# EAGLE board Bottom_Board (EAGLE 6.5.0)
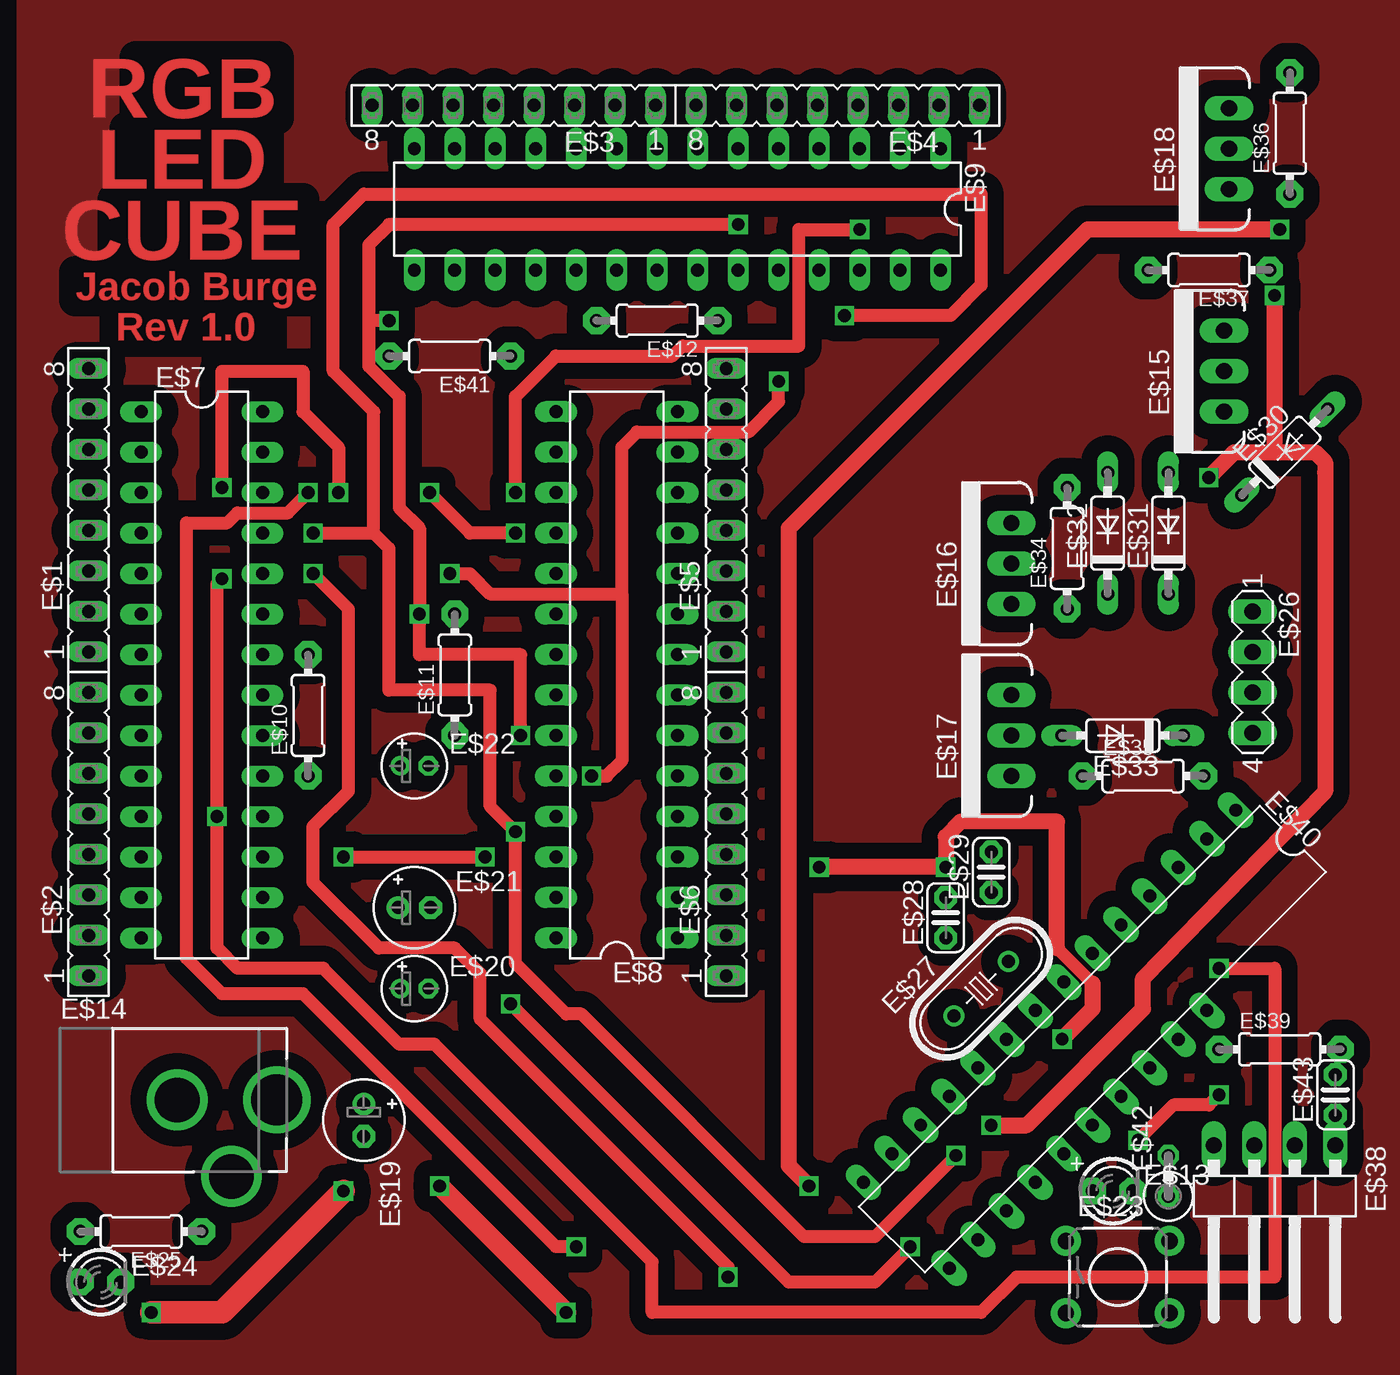
[diagram p0: board, top side]
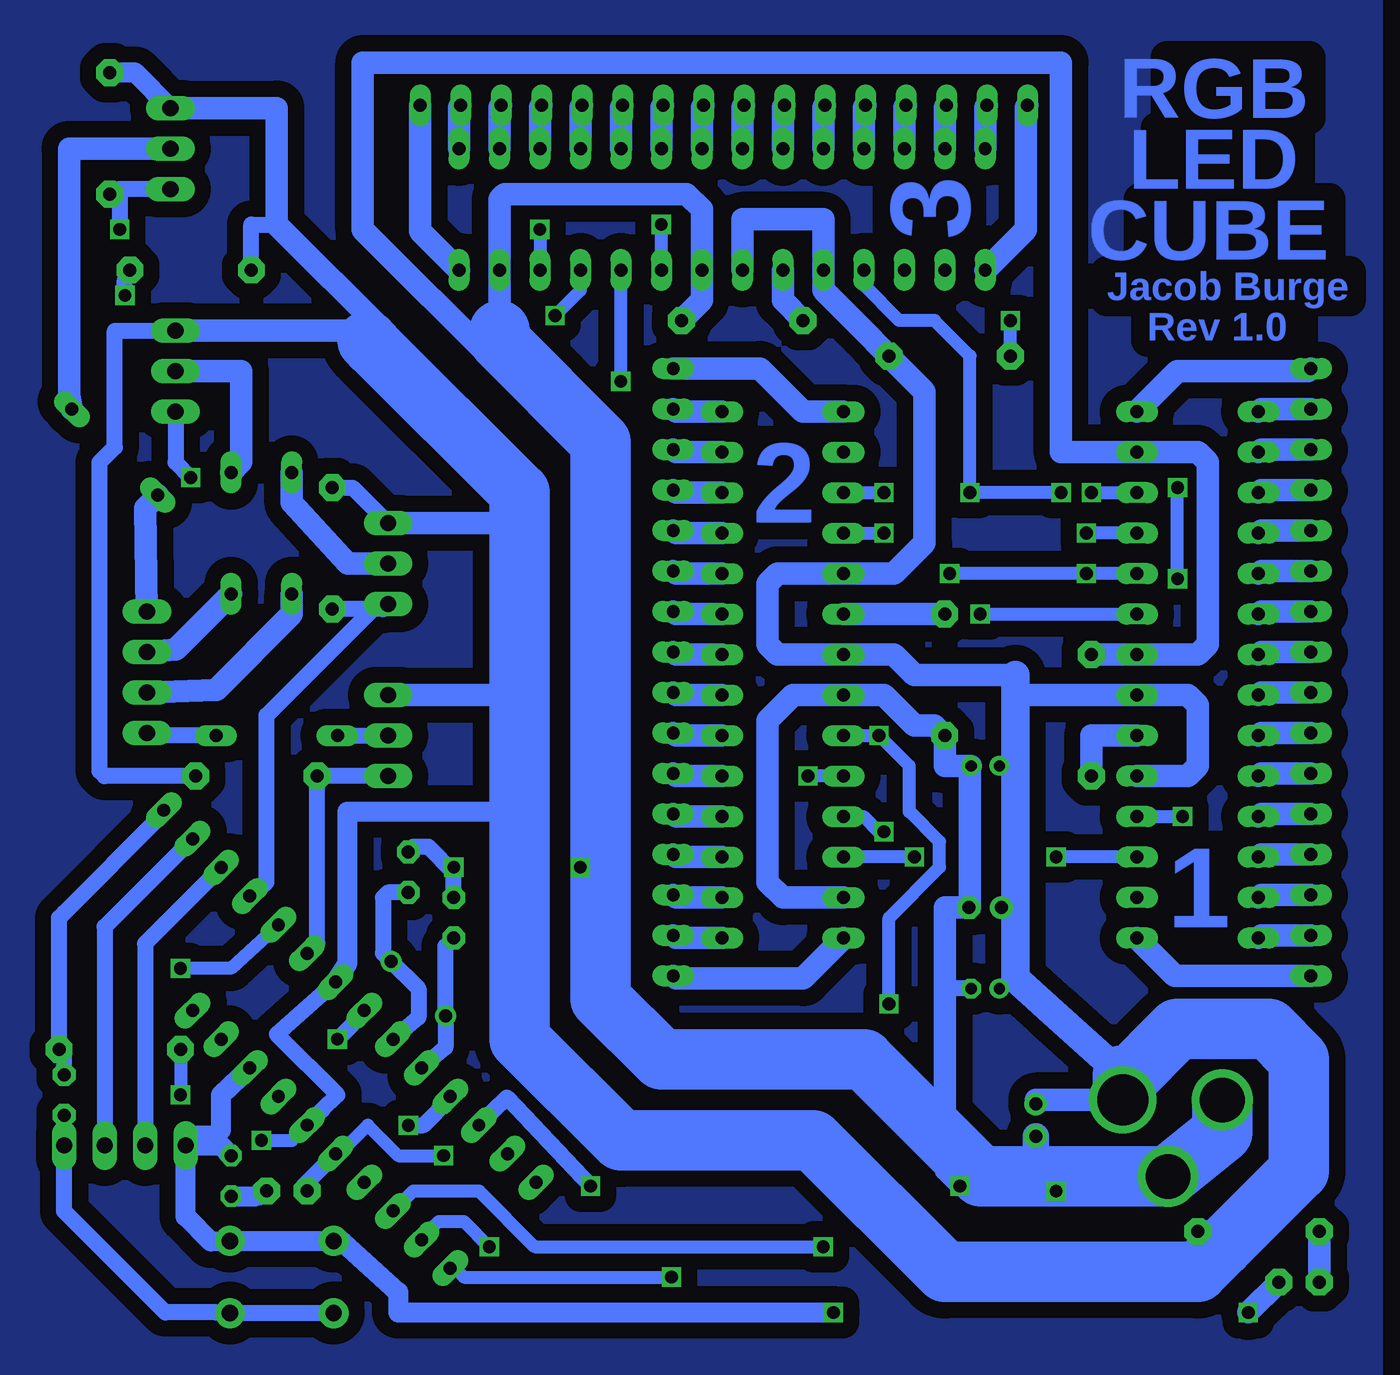
[diagram p1: board, bottom side, seen from below]

No outline drawn. Coordinates in mm, seen from the top.
Copper layers (1*16): Top 0.035mm / dielectric 1.5mm / Bottom 0.035mm
Design rules "default": minimum track width 10mil, minimum drill 24mil, track to track 8mil, track to pad 8mil, pad to pad 8mil, via to via 8mil, smd to smd 8mil, copper to edge 40mil, drill to drill 8mil, minimum pad ring 10mil, minimum via ring 8mil, stop-mask expansion 4mil, vias tented up to drill 0mil, thermal gap 10mil

## Footprints (pad centres in the part's own frame; a part is rotated, then mirrored left to right if it is on the bottom)
FE08 = drill 0.813 long: 1 -8.89,0; 2 -6.35,0; 3 -3.81,0; 4 -1.27,0; 5 1.27,0; 6 3.81,0; 7 6.35,0; 8 8.89,0
DIL28-3 = drill 0.813 long: 1 -16.51,-3.81; 2 -13.97,-3.81; 3 -11.43,-3.81; 4 -8.89,-3.81; 5 -6.35,-3.81; 6 -3.81,-3.81; 7 -1.27,-3.81; 8 1.27,-3.81; 9 3.81,-3.81; 10 6.35,-3.81; 11 8.89,-3.81; 12 11.43,-3.81; 13 13.97,-3.81; 14 16.51,-3.81; 15 16.51,3.81; 16 13.97,3.81; 17 11.43,3.81; 18 8.89,3.81; 19 6.35,3.81; 20 3.81,3.81; 21 1.27,3.81; 22 -1.27,3.81; 23 -3.81,3.81; 24 -6.35,3.81; 25 -8.89,3.81; 26 -11.43,3.81; 27 -13.97,3.81; 28 -16.51,3.81
0204/7 = drill 0.813 pad 1.676 octagon: 1 -3.81,0; 2 3.81,0
LED3MM = drill 0.813 pad 1.676 octagon: A -1.27,0; K 1.27,0
DCJACK_2MM_PTH = drill 2.8: GND 0,7.35; GNDBREAK 4.8,10.75 | drill 3.2: PWR 0,13.6
TO220V = drill 1.016 long: 1 -2.54,0; 2 0,0; 3 2.54,0
E2-5 = drill 0.813 pad 1.422: + -1.016,0 | drill 0.813 pad 1.422 octagon: - 1.016,0
E1,8-4 = drill 0.711 pad 1.168: + -0.889,0 | drill 0.711 pad 1.168 octagon: - 0.889,0
TACTILE-PTH = drill 1.016 pad 1.88: 1 -3.251,2.261; 2 3.251,2.261; 3 -3.251,-2.261; 4 3.251,-2.261
MA04-1 = drill 1.016 long: 1 -3.81,0; 2 -1.27,0; 3 1.27,0; 4 3.81,0
HC49/S = drill 0.813: 1 -2.413,0; 2 2.413,0
C025-024X044 = drill 0.813 pad 1.422 octagon: 1 -1.27,0; 2 1.27,0
DIODE_DO35-7 = drill 0.813 long: A 3.81,0; C -3.81,0
1X04/90 = drill 1.016 long: 1 -3.81,-3.81; 2 -1.27,-3.81; 3 1.27,-3.81; 4 3.81,-3.81
DIP_28_MOD = drill 0.813 long: 1 -16.51,-3.81; 2 -13.97,-3.81; 3 -11.43,-3.81; 4 -8.89,-3.81; 5 -6.35,-3.81; 6 -3.81,-3.81; 7 -1.27,-3.81; 8 1.27,-3.81; 9 3.81,-3.81; 10 6.35,-3.81; 11 8.89,-3.81; 12 11.43,-3.81; 13 13.97,-3.81; 14 16.51,-3.81; 15 16.51,3.81; 16 13.97,3.81; 17 11.43,3.81; 18 8.89,3.81; 19 6.35,3.81; 20 3.81,3.81; 21 1.27,3.81; 22 -1.27,3.81; 23 -3.81,3.81; 24 -6.35,3.81
0309V = drill 0.813 octagon: 1 -1.27,0; 2 1.27,0

## Placement (x,y rotation side)
E$1  [FE08]  4.33,52.87 90 top
E$2  [FE08]  4.33,32.55 90 top
E$3  [FE08]  31,78.27 180 top
E$4  [FE08]  51.32,78.27 180 top
E$5  [FE08]  44.34,52.87 90 top
E$6  [FE08]  44.34,32.55 90 top
E$7  [DIL28-3]  11.43,42.55 270 top
E$8  [DIL28-3]  37.47,42.55 90 top
E$9  [DIL28-3]  41.27,71.75 180 top
E$10  [0204/7]  18.1,40.01 90 top
E$11  [0204/7]  27.3,42.55 90 top
E$12  [0204/7]  40.01,64.77 180 top
E$13  [LED3MM]  68.58,10.16 0 top
E$14  [DCJACK_2MM_PTH]  2.54,15.88 270 top
E$15  [TO220V]  75.56,61.59 90 top
E$16  [TO220V]  62.23,49.53 90 top
E$17  [TO220V]  62.23,38.73 90 top
E$18  [TO220V]  75.88,75.56 90 top
E$19  [E2-5]  21.59,14.61 270 top
E$20  [E1,8-4]  24.77,22.86 0 top
E$21  [E2-5]  24.77,27.94 0 top
E$22  [E1,8-4]  24.77,36.83 0 top
E$23  [TACTILE-PTH]  68.9,4.76 0 top
E$24  [LED3MM]  5.08,4.45 0 top
E$25  [0204/7]  7.62,7.62 180 top
E$26  [MA04-1]  77.36,42.71 270 top
E$27  [HC49/S]  60.33,22.86 45 top
E$28  [C025-024X044]  58.1,27.3 90 top
E$29  [C025-024X044]  60.96,30.16 90 top
E$30  [DIODE_DO35-7]  79.38,56.52 45 top
E$31  [DIODE_DO35-7]  72.07,51.44 90 top
E$32  [DIODE_DO35-7]  68.26,51.44 90 top
E$33  [DIODE_DO35-7]  69.22,38.73 180 top
E$34  [0204/7]  65.72,50.48 90 top
E$35  [0204/7]  70.48,36.2 0 top
E$36  [0204/7]  79.69,76.52 90 top
E$37  [0204/7]  74.61,67.94 180 top
E$38  [1X04/90]  78.74,9.21 180 top
E$39  [0204/7]  79.06,19.05 0 top
E$40  [DIP_28_MOD]  67.31,19.68 225 top
E$41  [0204/7]  26.99,62.55 180 top
E$42  [0309V]  72.07,11.11 90 top
E$43  [C025-024X044]  82.55,16.19 90 top

## Library data of the parts
E$1-E$6 = con-lsta
E$7-E$9 = 40xx
E$10-E$14 E$19-E$22 E$24 E$25 E$27-E$29 E$34-E$37 E$39 E$41-E$43 = adafruit
E$15-E$18 = SparkFun-DiscreteSemi
E$23 = SparkFun-Electromechanical
E$26 = con-lstb
E$30-E$33 = eagle-ltspice
E$38 = pinhead
E$40 = DIP_28_MOD

## Nets
S$1: E$1.7 E$7.1
S$2: E$1.6 E$7.2
S$3: E$1.5 E$7.3
S$4: E$1.4 E$7.4
S$5: E$1.3 E$7.5
S$6: E$1.2 E$7.6
S$7: E$1.1 E$7.7
S$8: E$2.8 E$7.8
S$9: E$2.7 E$7.9
S$10: E$2.6 E$7.10
S$11: E$2.5 E$7.11
S$12: E$2.4 E$7.12
S$13: E$2.3 E$7.13
S$14: E$2.2 E$7.14
S$15: E$2.1 E$7.15
S$16: E$1.8 E$7.28
S$17: E$3.7 E$9.14
S$18: E$3.6 E$9.13
S$19: E$3.5 E$9.12
S$20: E$3.4 E$9.11
S$21: E$3.3 E$9.10
S$22: E$3.2 E$9.9
S$23: E$3.1 E$9.8
S$24: E$4.8 E$9.7
S$25: E$4.7 E$9.6
S$26: E$4.6 E$9.5
S$27: E$4.5 E$9.4
S$28: E$4.4 E$9.3
S$29: E$4.3 E$9.2
S$30: E$4.2 E$9.1
S$31: E$4.1 E$9.28
S$32: E$3.8 E$9.15
S$33: E$5.7 E$8.14
S$34: E$5.6 E$8.13
S$35: E$5.5 E$8.12
S$36: E$5.4 E$8.11
S$37: E$5.3 E$8.10
S$38: E$5.2 E$8.9
S$39: E$5.1 E$8.8
S$40: E$6.8 E$8.7
S$41: E$6.7 E$8.6
S$42: E$6.6 E$8.5
S$43: E$6.5 E$8.4
S$44: E$6.4 E$8.3
S$45: E$6.2 E$8.1
S$46: E$6.3 E$8.2
S$47: E$6.1 E$8.28
S$48: E$5.8 E$8.15
S$49: E$7.22 E$7.27 E$9.22 E$9.27 E$10.2 E$12.1
S$50: E$9.20 E$12.2
S$51: E$8.20 E$11.2
S$52: E$7.20 E$10.1
S$54: E$20.-
S$56: E$14.GND E$14.GNDBREAK E$24.K
S$57: E$7.26 E$40.17
S$58: E$19.-
S$59: E$24.A E$25.2
S$60: E$27.1 E$28.1
S$61: E$27.2 E$29.1
S$62: E$18.1 E$36.1
S$64: E$17.1 E$35.1
S$65: E$16.1 E$34.1 E$40.4
S$66: E$26.1 E$30.C
S$67: E$18.2 E$30.A
S$68: E$15.2 E$31.A
S$69: E$26.2 E$31.C
S$70: E$26.3 E$32.C
S$71: E$16.2 E$32.A
S$72: E$17.2 E$33.A
S$73: E$26.4 E$33.C
S$75: E$7.19 E$7.21 E$8.19 E$8.21 E$9.19 E$9.21 E$14.PWR E$17.3 E$18.3 E$19.+ E$20.+ E$21.+ E$22.+ E$25.1 E$36.2 E$37.2 E$39.1
S$77: E$23.3 E$23.4 E$38.1 E$43.1
S$79: E$38.2
S$80: E$38.3
S$81: E$23.1 E$23.2 E$38.4 E$40.22 E$42.2
S$82: E$7.25 E$8.25 E$9.25 E$13.A E$40.19
S$83: E$13.K E$42.1
S$84: E$28.2 E$29.2
S$85: E$7.18 E$8.18 E$9.18 E$40.5
S$86: E$15.3 E$35.2
S$87: E$16.3
S$88: E$34.2
S$89: E$15.1 E$37.1
S$90: E$7.17 E$8.26
S$91: E$8.17 E$9.26
S$92: E$7.24 E$8.24 E$9.24 E$40.15
S$93: E$7.23 E$8.23 E$9.23 E$40.16 E$41.2
S$94: E$8.22 E$8.27 E$11.1 E$22.-
S$95: E$39.2 E$43.2

## Tracks (layer width: path | path; a pad name or v marks a point on that pad's centre or on a via)
S$1
  Bottom 1.422: E$7.1 7.46,59.22 E$1.7
S$2
  Bottom 1.422: E$7.2 7.46,56.68 E$1.6
S$3
  Bottom 1.422: E$7.3 7.46,54.14 E$1.5
S$4
  Bottom 1.422: E$7.4 7.46,51.6 E$1.4
S$5
  Bottom 1.422: E$7.5 7.46,49.06 E$1.3
S$6
  Bottom 1.422: E$7.6 7.46,46.52 E$1.2
S$7
  Bottom 1.422: E$7.7 7.46,43.98 E$1.1
S$8
  Bottom 1.422: E$7.8 7.46,41.44 E$2.8
S$9
  Bottom 1.422: E$7.9 7.46,38.9 E$2.7
S$10
  Bottom 1.422: E$7.10 7.46,36.36 E$2.6
S$11
  Bottom 1.422: E$7.11 7.46,33.82 E$2.5
S$12
  Bottom 1.422: E$7.12 7.46,31.28 E$2.4
S$13
  Bottom 1.422: E$7.13 7.46,28.74 E$2.3
S$14
  Bottom 1.422: E$7.14 7.46,26.2 E$2.2
S$15
  Bottom 1.422: E$7.15 12.87,23.66 E$2.1
S$16
  Bottom 1.422: E$1.8 4.5,61.59 12.7,61.59 E$7.28
S$17
  Bottom 1.422: E$9.14 24.77,78.16 E$3.7
S$18
  Bottom 1.422: E$9.13 27.3,78.16 E$3.6
S$19
  Bottom 1.422: E$9.12 29.84,78.16 E$3.5
S$20
  Bottom 1.422: E$9.11 32.38,78.16 E$3.4
S$21
  Bottom 1.422: E$9.10 34.92,78.16 E$3.3
S$22
  Bottom 1.422: E$9.9 37.47,78.16 E$3.2
S$23
  Bottom 1.422: E$9.8 40.01,78.16 E$3.1
S$24
  Bottom 1.422: E$9.7 42.55,78.16 E$4.8
S$25
  Bottom 1.422: E$9.6 45.09,78.16 E$4.7
S$26
  Bottom 1.422: E$9.5 47.62,78.16 E$4.6
S$27
  Bottom 1.422: E$9.4 50.16,78.16 E$4.5
S$28
  Bottom 1.422: E$9.3 52.7,78.16 E$4.4
S$29
  Bottom 1.422: E$9.2 55.24,78.16 E$4.3
S$30
  Bottom 1.422: E$9.1 57.78,78.16 E$4.2
S$31
  Bottom 1.422: E$4.1 60.21,70.37 E$9.28
S$32
  Bottom 1.422: E$3.8 22.23,78.16 22.23,70.48 E$9.15
S$33
  Bottom 1.422: E$8.14 44.17,59.05 E$5.7
S$34
  Bottom 1.422: E$8.13 44.17,56.52 E$5.6
S$35
  Bottom 1.422: E$8.12 44.17,53.98 E$5.5
S$36
  Bottom 1.422: E$8.11 44.17,51.44 E$5.4
S$37
  Bottom 1.422: E$8.10 44.17,48.9 E$5.3
S$38
  Bottom 1.422: E$8.9 44.17,46.35 E$5.2
S$39
  Bottom 1.422: E$8.8 44.17,43.81 E$5.1
S$40
  Bottom 1.422: E$8.7 44.17,41.27 E$6.8
S$41
  Bottom 1.422: E$8.6 44.17,38.73 E$6.7
S$42
  Bottom 1.422: E$8.5 44.17,36.2 E$6.6
S$43
  Bottom 1.422: E$8.4 44.17,33.66 E$6.5
S$44
  Bottom 1.422: E$8.3 44.17,31.11 E$6.4
S$45
  Bottom 1.422: E$8.1 44.17,26.04 E$6.2
S$46
  Bottom 1.422: E$8.2 44.17,28.57 E$6.3
S$47
  Bottom 1.422: E$8.28 36.2,23.5 44.17,23.5 E$6.1
S$48
  Bottom 1.422: E$5.8 38.9,61.76 36.2,59.05 E$8.15
S$49
  Bottom 1.422: E$9.27 55.24,64.14 | E$9.27 55.24,72.39 54.93,72.71 43.5,72.71 42.55,71.75 E$9.22 42.55,66.04 E$12.1 | E$10.2 E$7.22 11.43,43.81 10.79,44.45 10.79,55.88 11.43,56.52 E$7.27 20,56.52 20,80.96 63.82,80.96 63.82,70.48 55.24,61.91 E$9.27
S$50
  Bottom 1.422: E$12.2 37.47,66.04 E$9.20
S$51
  Bottom 1.422: E$8.20 E$11.2
S$52
  Bottom 1.422: E$7.20 18.1,38.73 E$10.1
S$53
  Bottom 1.016: 76.29,34.05 76.52,33.66 82.55,27.62
S$54
  Bottom 1.016: E$20.- 27.3,22.86
S$55
  Bottom 1.422: 25.72,27.94 27.3,27.94 27.3,13.65
S$56  (via drill 0.8)
  Top 1.422: v8.26,2.54 12.7,2.54 v20.32,10.16
  Bottom 1.422: E$24.K v8.26,2.54 | v20.32,10.16 14.21,10.16 E$14.GNDBREAK
  Bottom 3.81: E$14.GND 9.89,13.84 E$14.GNDBREAK 25.05,11.07 32.38,18.41 45.09,18.41 48.9,22.23 48.9,57.15 55.24,63.5 55.24,64.14
S$57  (via drill 0.8)
  Top 0.813: v34.92,6.67 33.66,6.67 17.78,22.54 12.7,22.54 10.48,24.77 10.48,52.07 13.02,52.07 13.65,52.7 16.83,52.7 v18.1,53.98
  Bottom 0.813: v34.92,6.67 53.02,6.67 56.52,10.16 60.64,10.16 61.89,8.91 E$40.17 | v18.1,53.98 E$7.26
S$58
  Bottom 1.676: E$19.- 21.59,11.43
S$59
  Bottom 1.422: E$25.2 E$24.A
S$60
  Bottom 1.016: 60.13,17.89 58.62,19.16 E$27.1 58.62,25.52 E$28.1
S$61
  Bottom 1.016: 61.92,19.68 60.33,21.04 60.33,22.86 E$27.2 62.55,25.08 62.55,28.57 62.23,28.89 E$29.1
S$62  (via drill 0.8)
  Top 1.016: v49.53,10.48 48.26,11.75 48.26,51.75 66.99,70.48 v79.06,70.48
  Bottom 1.016: 56.53,14.3 54.77,16.04 v49.53,10.48 | 79.06,73.03 v79.06,70.48 | E$18.1 79.06,73.03 | 79.06,73.03 E$36.1
S$63  (via drill 0.8)
  Top 1.016: v60.96,14.29 63.18,14.29 70.48,21.59 70.48,23.5 81.92,35.24 81.92,55.24
  Bottom 1.016: v60.96,14.29 60.01,14.29 58.33,15.96 58.33,16.09
S$64
  Bottom 1.016: 67.31,25.07 66.67,25.72 E$35.1 E$17.1
S$65
  Bottom 1.016: E$34.1 62.55,46.67 E$16.1 62.87,46.99 69.85,40.01 69.85,29.53 E$40.4
S$66
  Bottom 1.422: E$30.C 77.47,53.02 E$26.1
S$67
  Bottom 1.422: E$18.2 82.23,75.56 82.23,60.01 E$30.A
S$68
  Bottom 1.422: E$15.2 71.44,61.59 71.44,55.88 E$31.A
S$69
  Bottom 1.422: E$31.C 75.56,44.13 E$26.2
S$70
  Bottom 1.422: E$26.3 73.03,41.59 68.26,46.35 E$32.C
S$71
  Bottom 1.422: E$16.2 64.77,49.53 68.26,53.34 E$32.A
S$72
  Bottom 1.016: E$33.A E$17.2
S$73
  Bottom 1.016: E$33.C 76.83,38.73 E$26.4
S$74  (via drill 0.8)
  Top 1.27: v34.29,2.54 v26.35,10.48
  Bottom 1.27: 65.09,6.99 61.59,3.81 61.59,2.54 v34.29,2.54 | v26.35,10.48 27.3,11.43 27.3,13.97 26.99,13.97
S$75  (via drill 0.8)
  Top 0.813: v75.25,16.19 74.61,15.56 72.39,15.56 v70.17,13.34
  Bottom 0.813: E$39.1 v75.25,16.19 | v70.17,13.34 68.26,13.34 67.31,14.29 67.31,14.3
  Bottom 1.016: E$22.+ 22.86,36.83 | E$21.+ 22.86,27.94 | E$20.+ 22.86,23.5 | 67.31,14.3 66.36,15.24 65.41,16.19 69.22,20 66.36,22.54 65.51,23.28 | E$37.2 70.8,70.8 69.22,70.8
  Bottom 1.27: 65.51,23.28 64.77,24.45 64.77,33.97 53.98,33.97 | E$18.3 78.11,80.33 E$36.2
  Bottom 1.422: E$9.21 40.01,71.12 34.92,71.12 E$9.19 34.92,66.67 28.57,60.33 28.57,50.8 30.48,48.9 E$8.19 37.78,48.9 38.42,48.26 38.42,44.45 37.78,43.81 E$8.21 30.48,43.81 29.21,42.55 22.86,42.55 22.86,41.27 E$7.21 12.06,41.27 11.43,40.64 11.43,36.83 12.06,36.2 E$7.19 | E$14.PWR 21.59,15.88 E$19.+ | E$25.1 10.79,7.62 9.84,6.67 | E$18.3 69.22,78.11 69.22,70.8 62.23,63.82 61.91,62.87 63.18,63.18 | E$17.3 53.02,41.27 53.98,40.96
  Bottom 1.778: 16.14,17.41 20.52,21.37 22.86,23.5 22.86,27.94 22.86,36.83 22.86,42.55
  Bottom 3.81: 16.14,17.41 E$14.PWR 16.14,16.88 12.7,20.32 6.99,20.32 5.08,18.41 5.08,11.43 9.84,6.67 11.43,5.08 27.3,5.08 35.56,13.34 47.62,13.34 53.98,19.68 53.98,33.97 53.98,40.96 53.98,53.98 63.18,63.18 63.5,63.5
S$77
  Bottom 1.016: E$23.3 E$23.4 73.03,2.54 76.2,2.54 82.55,8.89 E$38.1 E$43.1
S$79
  Bottom 1.016: 74.49,32.26 80.01,26.74 E$38.2
S$80
  Bottom 1.016: 72.7,30.46 77.47,25.69 E$38.3
S$81
  Bottom 1.27: E$23.1 E$23.2 73.34,6.99 74.93,8.57 E$38.4 | E$38.4 72.71,13.02 E$42.2 | E$38.4 74.93,13.65 73.03,13.65 72.71,13.97 72.71,16.19 E$40.22
S$82  (via drill 0.8)
  Top 0.813: v58.74,12.38 53.66,7.3 49.21,7.3 35.24,21.27 34.29,21.27 31.11,24.45 v31.11,32.7 29.53,34.29 29.53,41.59 23.18,41.59 23.18,50.48 22.23,51.44 | v18.41,51.44 22.23,51.44 | 22.23,51.44 22.23,59.05 19.68,61.59 19.68,70.8 21.59,72.71 60.33,72.71 60.33,66.99 58.42,65.09 v51.75,65.09
  Bottom 0.813: E$40.19 65.29,12.5 63.5,14.29 61.59,12.38 v58.74,12.38 | E$8.25 32.38,33.66 31.43,32.7 v31.11,32.7 | E$7.25 v18.41,51.44 | v51.75,65.09 50.16,66.67 E$9.25
  Bottom 1.016: E$13.A 67.54,10.48 E$40.19
S$83
  Bottom 1.27: E$42.1 70.48,9.84 E$13.K
S$84  (via drill 0.8)
  Top 0.813: 65.09,25.4 67.31,23.18
  Top 1.016: 65.09,25.4 65.09,33.34 59.05,33.34 58.1,32.38 v58.1,30.48 v50.16,30.48 | 67.31,23.18 67.31,21.59 v65.41,19.68
  Bottom 1.016: E$29.2 60.64,31.75 59.69,31.75 58.1,30.16 E$28.2 v58.1,30.48 | v50.16,30.48 50.16,28.57 | v65.41,19.68 63.5,21.59
S$85  (via drill 0.8)
  Top 0.813: v75.25,24.13 78.74,24.13 78.74,4.76 62.55,4.76 60.33,2.54 39.69,2.54 39.69,5.71 26.04,19.37 23.81,19.37 19.05,24.13 13.65,24.13 12.38,25.4 v12.38,33.66 12.38,48.26 v12.7,48.58 | v12.7,54.29 12.7,61.59 17.78,61.59 17.78,59.05 20,56.83 v20,53.98 | v31.11,51.44 28.26,51.44 v25.72,53.98
  Bottom 0.813: E$40.5 72.07,24.13 v75.25,24.13 | E$7.18 v12.38,33.66 | v12.7,48.58 v12.7,54.29 | v20,53.98 v25.72,53.98 25.72,62.55 27.94,64.77 30.16,64.77 32.38,66.99 E$9.18 | E$8.18 v31.11,51.44
S$86
  Bottom 1.016: E$35.2 80.01,36.2 80.33,36.51 80.33,55.88 79.38,56.83 79.38,64.14 E$15.3
  Bottom 1.422: E$15.3 63.82,64.14
S$87
  Bottom 1.422: E$16.3 53.34,52.07 63.82,63.18
S$88
  Bottom 1.016: E$34.2 64.45,54.29 62.23,52.07
S$89  (via drill 0.8)
  Top 1.016: 78.74,56.52 v78.74,66.36 | 78.74,56.52 76.2,56.52 v74.61,54.93 | 78.74,56.52 81.28,56.52 81.92,55.88 81.92,55.24
  Bottom 1.016: E$37.1 78.74,67.31 v78.74,66.36 | E$15.1 75.56,55.88 v74.61,54.93
S$90  (via drill 0.8)
  Top 0.813: v20.32,31.11 v29.21,31.11
  Bottom 0.813: E$7.17 v20.32,31.11 | v29.21,31.11 E$8.26
S$91  (via drill 0.8)
  Top 0.813: v31.11,53.98 31.11,60.01 33.66,62.55 40.96,62.55 41.59,63.18 48.9,63.18 48.9,70.48 v52.7,70.48
  Bottom 0.813: E$8.17 v31.11,53.98 | v52.7,70.48 E$9.26
S$92  (via drill 0.8)
  Top 0.813: v44.45,4.76 44.45,5.4 28.89,20.95 28.89,23.81 27.3,25.4 22.54,25.4 18.41,29.53 18.41,33.02 20.64,35.24 20.64,46.67 v18.41,48.9 | v26.99,48.9 28.26,48.9 29.53,47.62 37.78,47.62 | 37.78,47.62 37.78,37.15 36.83,36.2 v35.88,36.2 | 37.78,47.62 37.78,56.83 38.73,57.78 45.72,57.78 47.62,59.69 v47.62,60.96
  Bottom 0.813: E$40.15 58.02,5.32 57.47,4.76 v44.45,4.76 | E$7.24 v18.41,48.9 v26.99,48.9 | E$8.24 v35.88,36.2 | v47.62,60.96 E$9.24
S$93  (via drill 0.8)
  Top 0.813: v55.88,6.67 53.66,4.45 48.26,4.45 v30.8,21.91 | v31.43,38.73 31.43,43.81 25.08,43.81 v25.08,46.35 25.08,51.75 23.81,53.02 23.81,60.01 21.91,61.91 21.91,64.77 | v45.09,70.8 23.18,70.8 21.91,69.53 21.91,64.77 | v23.18,64.77 21.91,64.77
  Bottom 0.813: E$40.16 60.13,7.18 59.05,8.26 57.47,8.26 v55.88,6.67 | v30.8,21.91 30.8,27.3 27.62,30.48 27.62,32.07 29.53,33.97 29.53,36.83 v31.43,38.73 E$8.23 | v25.08,46.35 E$7.23 | E$9.23 v45.09,70.8 | E$41.2 v23.18,64.77
S$94
  Bottom 1.422: E$22.- 25.72,36.83 | 25.72,36.83 27.3,36.83 E$11.1 27.94,39.37 29.21,39.37 31.11,41.27 E$8.22 36.83,41.27 38.42,39.69 38.42,29.53 37.47,28.57 E$8.27 | 25.72,36.83 25.72,27.94
S$95
  Bottom 1.016: E$43.2 82.55,18.73 E$39.2 82.87,27.3 82.55,27.62
S$96
  pour Bottom (isolate 1.016): 0,86.36 0,-2.54 88.9,-2.54 88.9,86.36
S$97
  pour Top (isolate 1.016): 0,86.36 88.9,86.36 88.9,-2.54 0,-2.54

## Text on the board
Top: RGB | LED | CUBE | Jacob Burge | Rev 1.0
Bottom: RGB | LED | CUBE | 3 | Jacob Burge | Rev 1.0 | 2 | 1